# EAGLE board Session 2 HW (EAGLE 9.6.2)
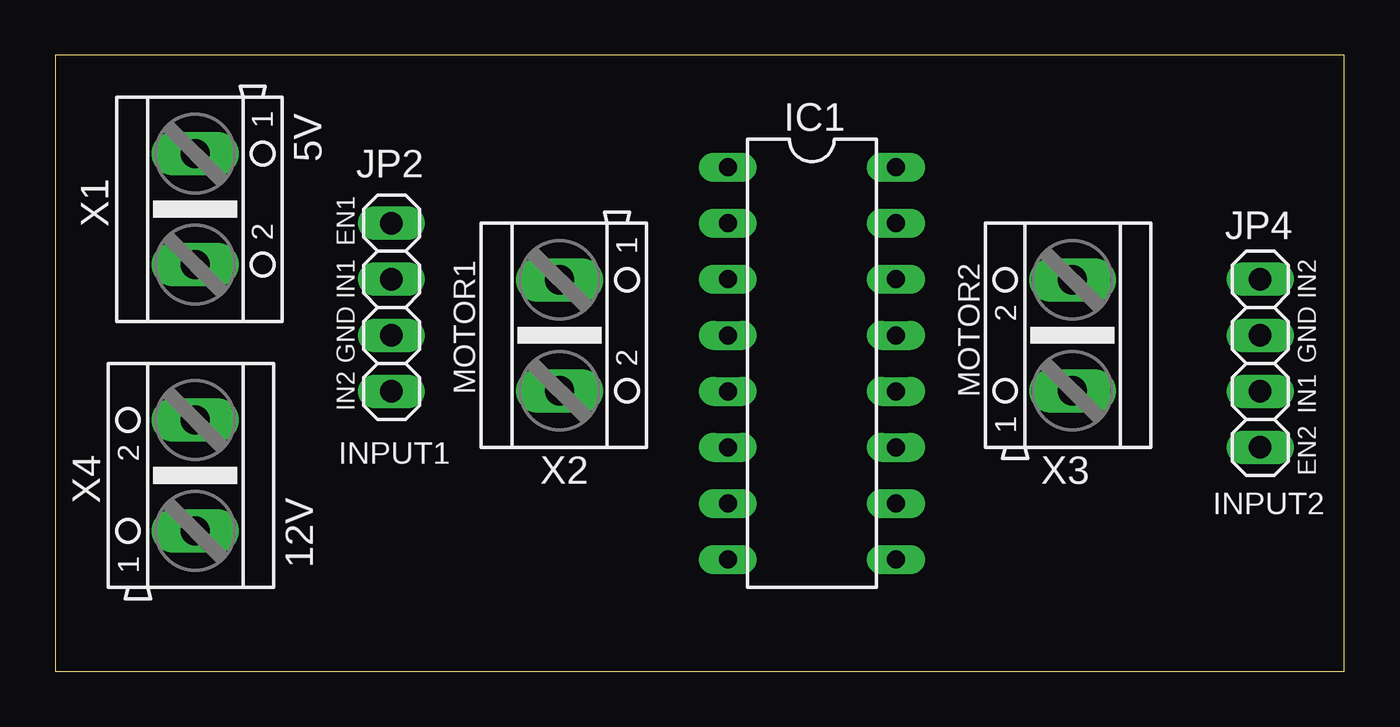
[diagram p0: board, top side]
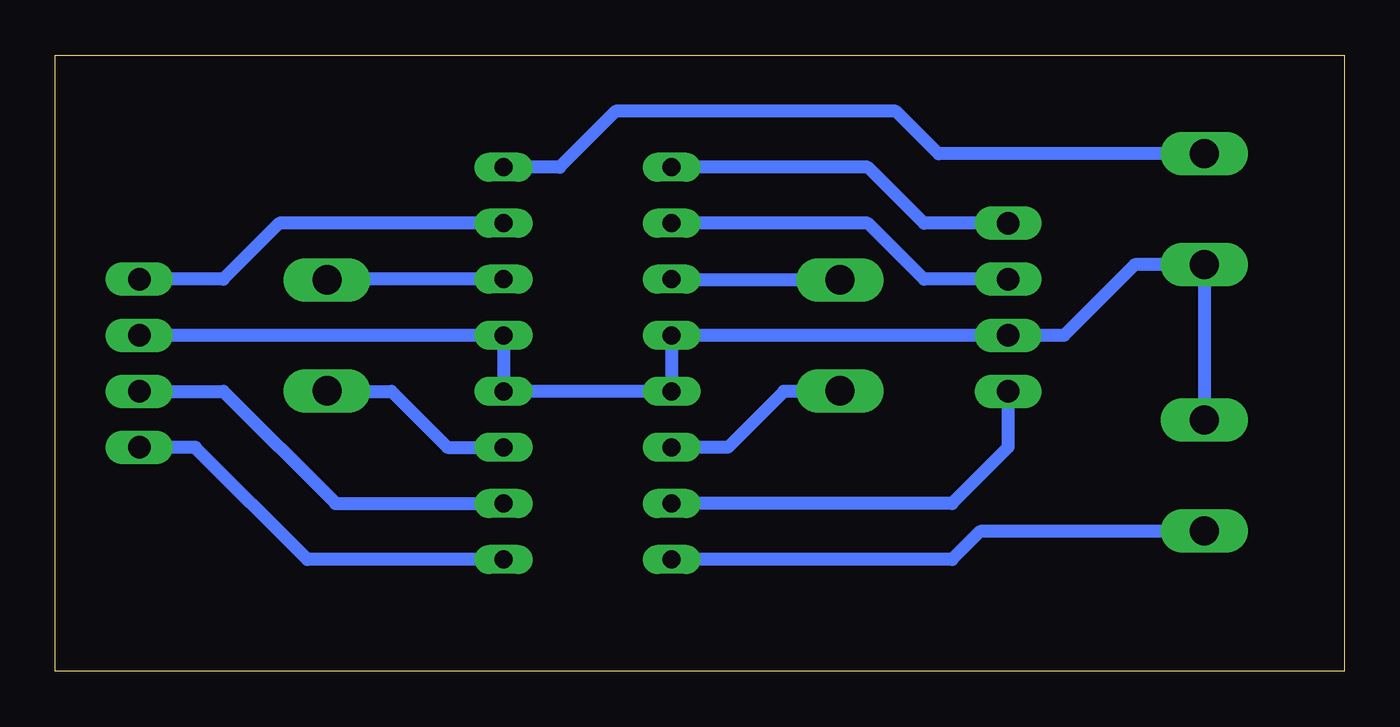
[diagram p1: board, bottom side, seen from below]

Size 58.42 x 27.94 mm. Coordinates in mm from the lower left corner, seen from the top.
Outline: 0,0 58.42,0 58.42,27.94 0,27.94 0,0
Copper layers (1*16): Top 0.035mm / dielectric 1.5mm / Bottom 0.035mm
Design rules "default *": minimum track width 0.6mm, minimum drill 0.6mm, track to track 0.6mm, track to pad 0.6mm, pad to pad 0.6mm, via to via 0.6mm, smd to smd 0.6mm, copper to edge 0.6mm, drill to drill 0.6mm, minimum pad ring 10mil, minimum via ring 8mil, stop-mask expansion 4mil, vias tented up to drill 0mil, thermal gap 10mil

## Footprints (pad centres in the part's own frame; a part is rotated, then mirrored left to right if it is on the bottom)
DIL16 = drill 0.813 long: 1 -8.89,-3.81; 2 -6.35,-3.81; 3 -3.81,-3.81; 4 -1.27,-3.81; 5 1.27,-3.81; 6 3.81,-3.81; 7 6.35,-3.81; 8 8.89,-3.81; 9 8.89,3.81; 10 6.35,3.81; 11 3.81,3.81; 12 1.27,3.81; 13 -1.27,3.81; 14 -3.81,3.81; 15 -6.35,3.81; 16 -8.89,3.81
1X04 = drill 1.016 long: 1 -3.81,0; 2 -1.27,0; 3 1.27,0; 4 3.81,0
AK500/2 = drill 1.321 long: 1 -2.515,0; 2 2.515,0

## Placement (x,y rotation side)
IC1  L293D  [DIL16]  34.29,13.97 270 top
JP2  [1X04]  15.24,16.51 270 top
JP4  [1X04]  54.61,13.97 270 top
X1  [AK500/2]  6.35,20.96 270 top
X2  [AK500/2]  22.86,15.24 270 top
X3  [AK500/2]  46.1,15.24 90 top
X4  [AK500/2]  6.35,8.89 90 top

## Library data of the parts
IC1 = st-microelectronics; MPN: L293D; OC_FARNELL: 9589619; OC_NEWARK: 56P8249
JP2 JP4 = pinhead
X1-X4 = con-ptr500; OC_FARNELL: unknown; OC_NEWARK: unknown

## Nets
+5V: IC1.16 X1.1
+12V: IC1.8 X4.1
GND: IC1.4 IC1.5 IC1.12 IC1.13 JP2.3 JP4.2 X1.2 X4.2
N$1: IC1.1 JP2.1
N$2: IC1.14 X3.2
N$3: IC1.2 JP2.2
N$4: IC1.3 X2.1
N$5: IC1.11 X3.1
N$6: IC1.15 JP4.1
N$7: IC1.9 JP4.4
N$8: IC1.6 X2.2
N$9: IC1.10 JP4.3
N$10: IC1.7 JP2.4

## Tracks (layer width: path | path; a pad name or v marks a point on that pad's centre or on a via)
+5V
  Bottom 0.6: X1.1 18.39,23.47 20.32,25.4 33.02,25.4 35.56,22.86 IC1.16
+12V
  Bottom 0.6: X4.1 6.38,6.35 16.51,6.35 17.78,5.08 IC1.8
GND
  Bottom 0.6: X4.2 X1.2 9.5,18.44 12.7,15.24 JP2.3 IC1.4 IC1.5 IC1.12 IC1.13 JP4.2
N$1
  Bottom 0.6: JP2.1 19.05,20.32 21.59,22.86 IC1.1
N$2
  Bottom 0.6: IC1.14 46.08,17.78 X3.2
N$3
  Bottom 0.6: JP2.2 19.05,17.78 21.59,20.32 IC1.2
N$4
  Bottom 0.6: X2.1 30.46,17.75 IC1.3
N$5
  Bottom 0.6: X3.1 46.08,12.7 43.18,12.7 40.64,10.16 IC1.11
N$6
  Bottom 0.6: IC1.15 48.26,20.32 50.8,17.78 JP4.1
N$7
  Bottom 0.6: IC1.9 46.99,5.08 52.07,10.16 JP4.4
N$8
  Bottom 0.6: X2.2 22.89,12.7 25.4,12.7 27.94,10.16 IC1.6
N$9
  Bottom 0.6: JP4.3 50.8,12.7 45.72,7.62 IC1.10
N$10
  Bottom 0.6: JP2.4 15.24,10.16 17.78,7.62 IC1.7

## Text on the board
tNames: 5V | EN1 | IN1 | IN2 | GND | GND | MOTOR1 | IN2 | MOTOR2 | IN1 | INPUT1 | EN2 | INPUT2 | 12V